# Altium PCB Communication_Board.PcbDoc
Units mm, origin at the board's own origin, x right, y up, seen from the top; angles counter-clockwise.
Board outline 100 x 100 mm, 2 copper layers (Top Layer, Bottom Layer); 16 components, 10 nets, 68 pads, 8 vias.
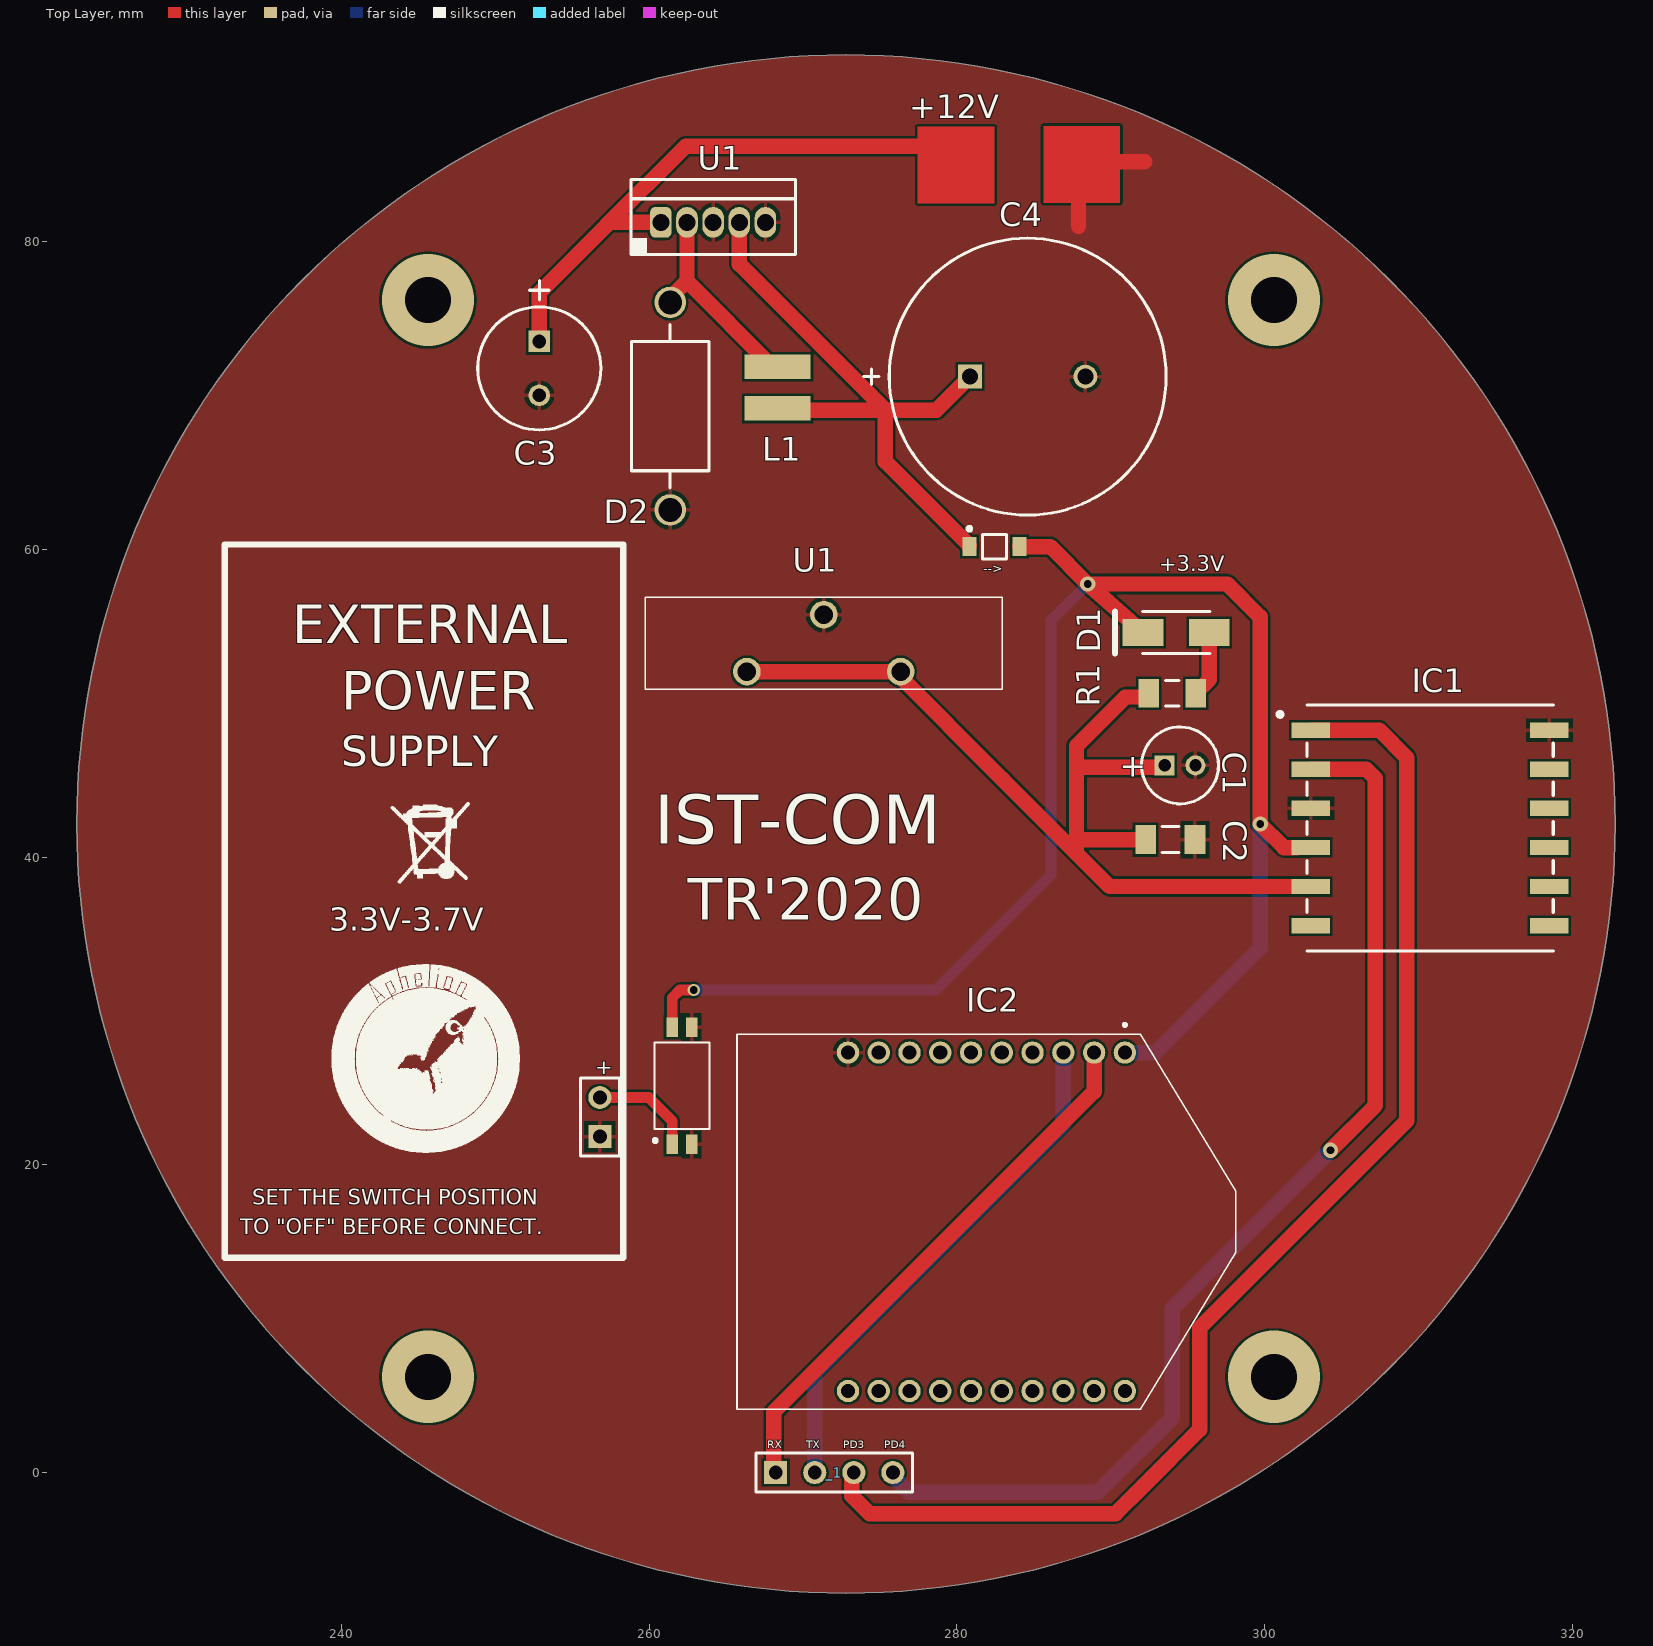
[diagram p0: Top Layer view]
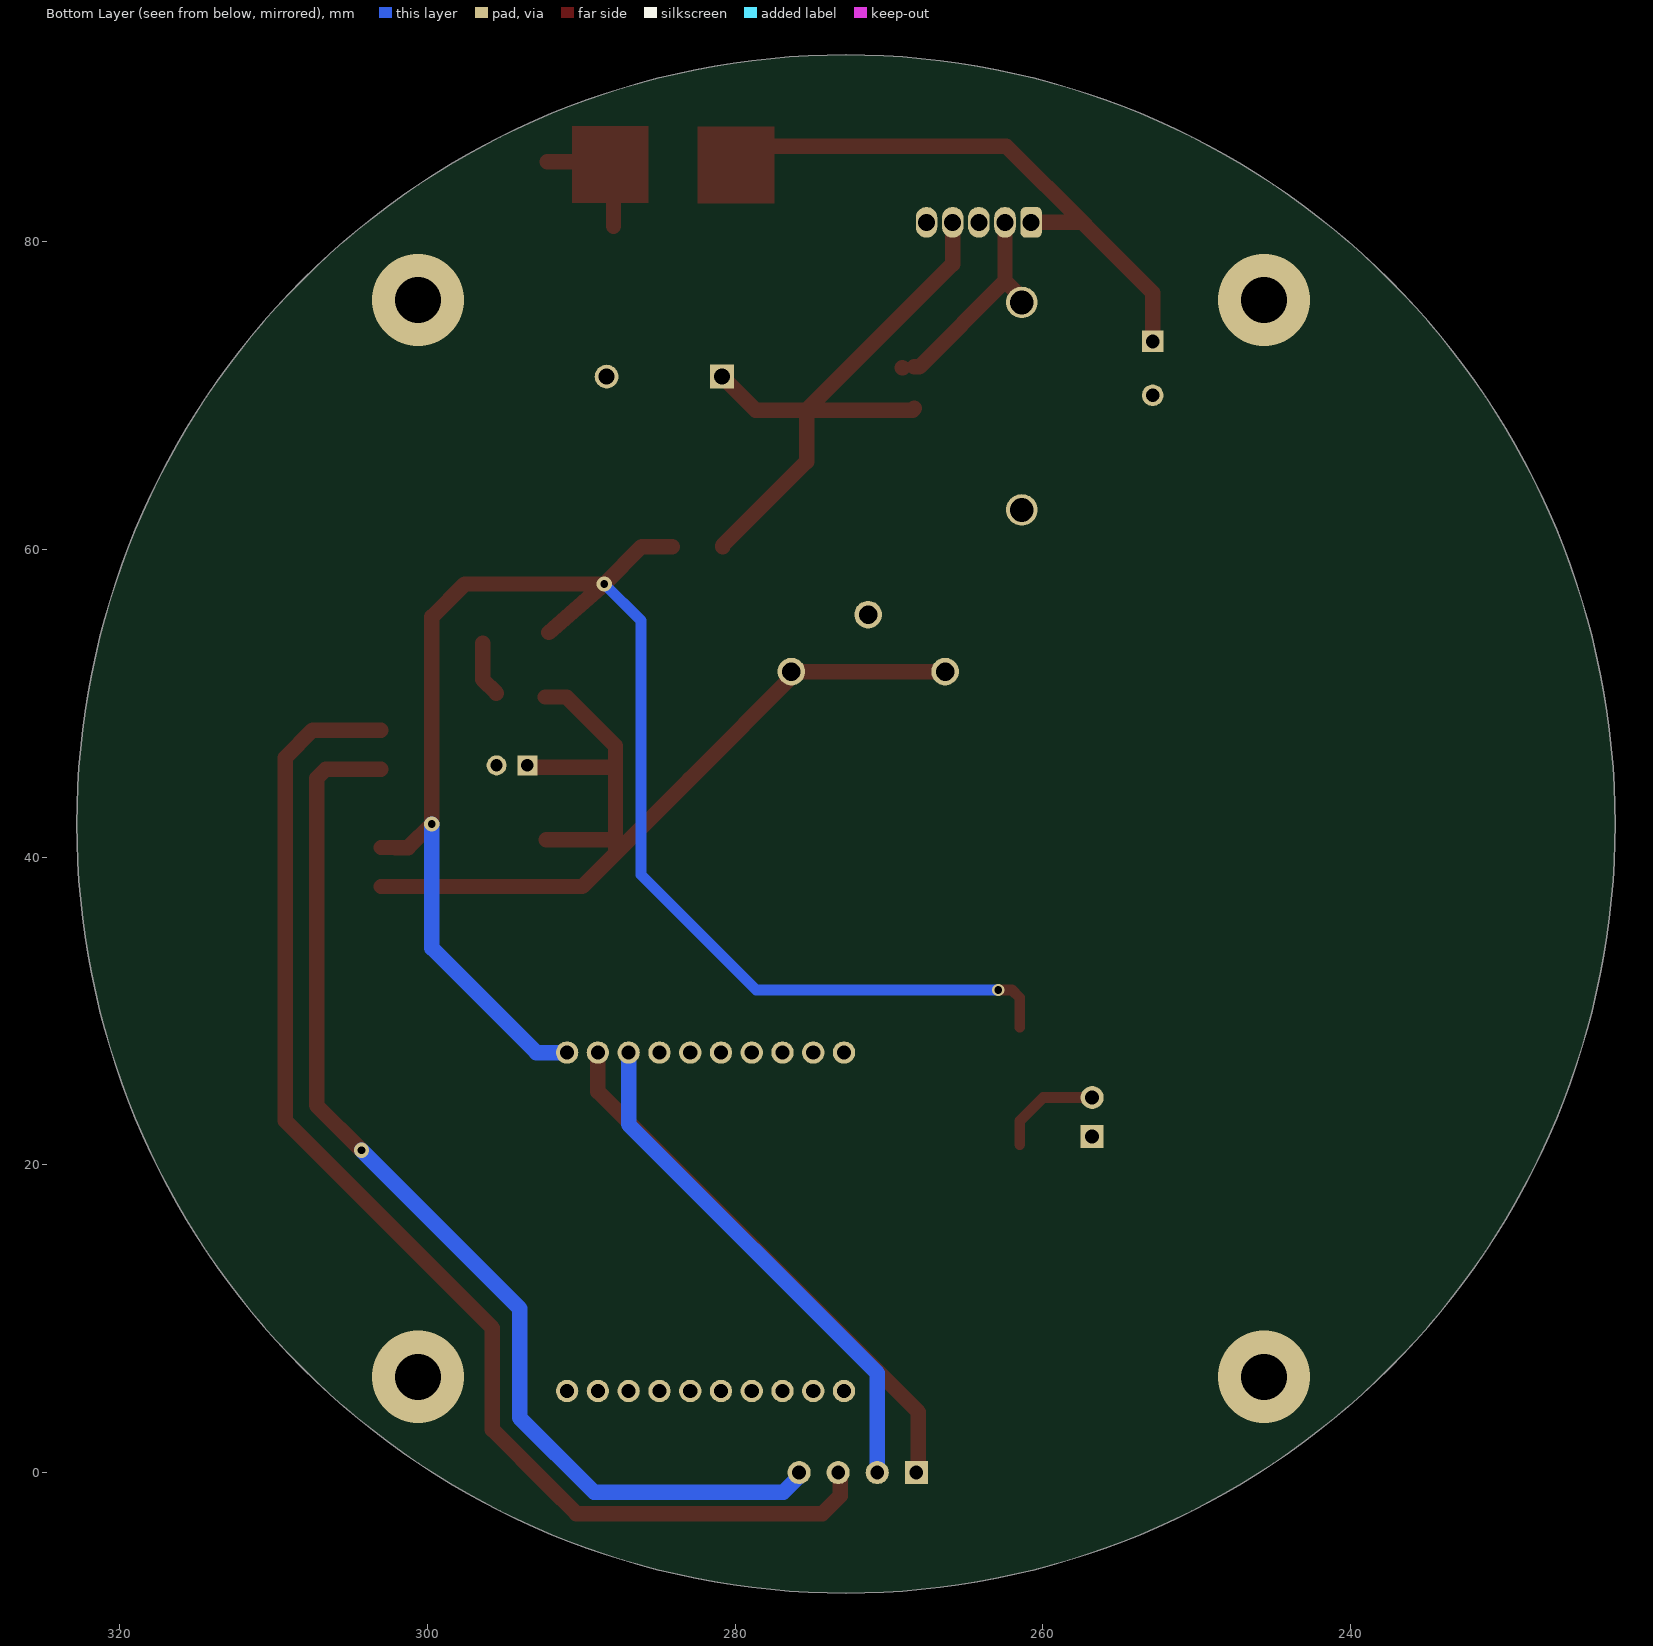
[diagram p1: Bottom Layer view, seen from below]

## Layer stack, top to bottom
Top Solder: solder mask 0.0102, Solder Resist, Dk 3.5
Top Layer: signal copper 0.0356
Dielectric 1: dielectric 0.32, FR-4, Dk 4.8
Bottom Layer: signal copper 0.0356
Bottom Solder: solder mask 0.0102, Solder Resist, Dk 3.5

## Board outline
222.796,42.164 ccw(c272.796,42.164) 272.796,-7.836 ccw(c272.796,42.164) 322.796,42.164 ccw(c272.796,42.164) 272.796,92.164 ccw(c272.796,42.164)

## Design rules (kind name [scope] priority, off if disabled: settings)
Clearance 0 [All] p1: gap=0.15 ignorepadtopadclearanceinfootprint=FALSE
Height [All] p1: minheight=0 maxheight=500 prefheight=12.7
PolygonConnect [All] p1: connectstyle=Relief reliefconductorwidth=0.254 reliefentries=4 polygonreliefangle="90 Angle" airgapwidth=0.254
RoutingVias [All] p1: holewidth=0.711 width=1.27 viastyle="Through Hole" minholewidth=0.711 minwidth=1.27 maxholewidth=0.711 maxwidth=1.27
SolderMaskExpansion [All] p1: expansion=0.102 istentingtop=FALSE
Width [All] p1: maxlimit=20 minlimit=0.1 preferedwidth=0.254 minimp=50.000000 maximp=50.000000 favimp=50.000000
29 further rules are at their usual default settings.

## Classes and differential pairs
component class Communication: C1 C2 C3 C4 D1 D2 IC1 IC2 L1 R1 U1

## Components (designator, comment, footprint, x,y, rotation, side; value= is the part's Value field where it differs from the comment)
_1 "Comment" HDR1X4 268.224,0 r0 top
C1 "10uF" CAPPR55-200-1100X500X1200 294.513,45.974 r0 top
C2 "CAP 100nF" CAPC1206(3216)190_M 293.878,41.148 r180 top value=100nF
C3 "100uF" CAPPR65-350-1150X800X1250 252.857,71.783 r270 top
C4 "330uF" CAPPR80-750-2000X1800X2200 284.607,71.247 r0 top
D1 "SS14" FAIR-DO-214AC-2_V 294.259,54.61 r180 top
D2 "1N5822" ONSC-AXIAL_LEAD-2-267-05_V 261.366,69.328 r270 top
IC1 "L80-M39" L80-M39 318.522,36.83 r180 top
IC2 "XBP24CZ7WIT-004" XBP24CZ7WIT004 290.925,27.305 r270 top
L1 "744031101" WE-TPC-3816-S 268.351,70.532 r270 top
R1 "1K" RESC3216X60X45ML15T20 294.005,50.673 r0 top
U1 "LM2575T-3.3/NOPB" KC0005A 264.16,81.28 r90 top (schematic designator U?)
U1 "KLS5-CR2032-04" KLS5CR203204 276.352,52.07 r180 top
? "Comment" ONSC-SOD-123-2-425-04_V 282.448,60.198 r0 top
? "Comment" HDR1X2 256.794,21.844 r90 top
? "Comment" 416131160802 262.128,25.146 r0 top

## Footprints (in the part's own frame and the unit in brackets; to place one, negate y for a bottom-side part, rotate by r counter-clockwise, add the part's x,y. Pads: shape width x height; smd on the part's side, far side on the other; paste and mask are expansions set on the pad)
416131160802 [mm] "02p, 1.27mm Pitch, Horizontal, HP Type, SMT, flat Actuator, black, with Tape, T&R"
  rect 0.76x1.27 smd: 1(-0.635,-3.81) 2(0.635,-3.81) 3(0.635,3.81) 4(-0.635,3.81)
  silkscreen extent -1.83,-3.66 1.79,2.8, body extent -1.79,-4 1.79,4, height 2.06
CAPC1206(3216)190_M [mm] "Chip Capacitor, Body 3.2x1.6mm, Height 1.9mm, IPC Low Density"
  rect 1.35x1.9 smd: 1(-1.6,0) 2(1.6,0)
  silkscreen extent -0.55,-0.85 0.55,0.85, body extent -1.7,-0.9 1.7,0.9, height 1.9
CAPPR55-200-1100X500X1200 [mm] "THD, 2-Leads, Dia 5mm, Body Length 11mm"
  rect 1.3x1.3 hole 0.8: 1(-1,0)
  round 1.3 hole 0.8: 2(1,0)
  silkscreen extent -2.5,-2.5 2.5,2.5, body extent -2.5,-2.5 2.5,2.5, height 12
CAPPR65-350-1150X800X1250 [mm] "THD, 2-Leads, Dia 8mm, Body 11.5mm"
  rect 1.4x1.4 hole 0.9: 1(-1.75,0)
  round 1.4 hole 0.9: 2(1.75,0)
  silkscreen extent -5.71,-4 4,4, body extent -4,-4 4,4, height 12.5
CAPPR80-750-2000X1800X2200 [mm] "THD, 2-Leads, Dia 18mm, Body Length 22mm"
  rect 1.55x1.55 hole 1.05: 1(-3.75,0)
  round 1.55 hole 1.05: 2(3.75,0)
  silkscreen extent -10.66,-9 9,9, body extent -9,-9 9,9, height 22
FAIR-DO-214AC-2_V [mm] "DO-214, 2-Leads, Body 4.375x2.725mm"
  rect 2.65x1.75 smd: 1(-2.15,0) 2(2.15,0)
  silkscreen extent -2.19,-1.36 3.98,1.36, body extent -2.19,-1.36 2.19,1.36, height 2.5
HDR1X2 [mm] "Connector; Header; 2 Position"
  rect 1.5x1.5 hole 0.9: 1(0,0)
  round 1.5 hole 0.9: 2(2.54,0)
  silkscreen extent -1.27,-1.27 3.81,1.27
HDR1X4 [mm] "Connector; Header; 4 Position"
  rect 1.5x1.5 hole 0.9: 1(0,0)
  round 1.5 hole 0.9: 2(2.54,0) 3(5.08,0) 4(7.62,0)
  silkscreen extent -1.27,-1.27 8.89,1.27
KC0005A [mm] "FM, 5-Leads, Body 10.16x8.46mm, Pitch 1.7mm"
  rrect50% 2x1.4 hole 1.1: 1(0,3.4)
  oval 2x1.4 hole 1.1: 2(0,1.7) 3(0,0) 4(0,-1.7) 5(0,-3.4)
  silkscreen extent -2.13,-5.35 2.8,5.35, body extent -2.08,-5.35 2.77,5.35, height 16.51
KLS5CR203204 [mm]
  round 1.8 hole 1.2: 1(0,0) 2(10,0) 3(5,-3.7)
  silkscreen extent -6.6,-4.85 16.6,1.15, body extent -6.6,-4.85 16.6,1.15, height 18.13
L80-M39 [mm]
  rect 2.5x1 smd: 1(15.5,-11.43) 2(15.5,-8.89) 3(15.5,-6.35) 4(15.5,-3.81) 5(15.5,-1.27) 6(15.5,1.27) 7(0,1.27) 8(0,-1.27) 9(0,-3.81) 10(0,-6.35) 11(0,-8.89) 12(0,-11.43)
  silkscreen extent -0.25,-13.08 17.65,2.92
ONSC-AXIAL_LEAD-2-267-05_V [mm] "AXIAL, 2-Leads, Diameter 5.05mm"
  round 2.05 hole 1.55: 1(-6.745,0) 2(6.745,0)
  silkscreen extent -5.32,-2.52 5.32,2.52
ONSC-SOD-123-2-425-04_V [mm] "SOD, 2-Leads, Body 2.69x1.6mm"
  rect 0.91x1.22 smd: 1(-1.635,0) 2(1.635,0)
  silkscreen extent -1.76,-0.8 0.78,1.28, body extent -1.35,-0.8 1.35,0.8, height 1.35
RESC3216X60X45ML15T20 [mm] "Chip Resistor, 2-Leads, Body 3.3x1.75mm, IPC Low Density"
  rect 1.35x1.85 smd: 1(-1.525,0) 2(1.525,0)
  silkscreen extent -0.45,-0.82 0.45,0.82, body extent -1.65,-0.87 1.65,0.87, height 0.6
WE-TPC-3816-S [mm] "SMD Inductor, 2-Leads, Body 3.8 x 3.8 mm"
  rect 1.6x4.3 smd: 1(-1.35,0) 2(1.35,0)
  body extent -1.9,-1.9 1.9,1.9, height 1.64
XBP24CZ7WIT004 [mm]
  round 1.45 hole 0.92: 1(0,0) 2(0,-2) 3(0,-4) 4(0,-6) 5(0,-8) 6(0,-10) 7(0,-12) 8(0,-14) 9(0,-16) 10(0,-18) 11(22,-18) 12(22,-16) 13(22,-14) 14(22,-12) 15(22,-10) 16(22,-8) 17(22,-6) 18(22,-4) 19(22,-2) 20(22,0)
  silkscreen extent -1.9,-25.21 23.19,7.21, body extent -1.19,-25.21 23.19,7.21, height 2.79

## Part data
C1: library part CMP-2100-03622-1, "Aluminum Electrolytic Capacitor, 10 uF, +/- 20%, 50 V, -40 to 85 degC, 2-Pin THD, RoHS, Bulk", Case/Package=Radial, Dielectric Material=Aluminium, Leakage Current=3uA, Manufacturer=Panasonic, Max Operating Temperature=85degC, Min Operating Temperature=-40degC, Package Description="2-Pin Radial Lead, Dia 5 mm, Height 12 mm", Package Quantity=200, Package Reference=CAPPR55-200-1100X500X1200, Ripple Current=65mA, Tolerance=20%, Voltage=50V, Capacitance=10uF, Datasheet URL=https://industrial.panasonic.com/cdbs/www-data/pdf/RDF0000/ABA0000C1218.pdf, Datasheet Version="Rev. 05, 10/2016", Diameter=5mm, Dissipation Factor=0.12%, Height=11mm, Height - Seated (Max)=0.472inch, Lead Diameter=0.5mm, Lead Free=LeadFree, Lead Pitch=2mm, Lead/Base Style=Straight, Length=11mm, Life (Hours)=2000Hour, Manufacturer URL=http://www.panasonic.com/, Mount=ThroughHole, Number of Pins=2, Packaging=Bulk, Radiation Hardening=No, REACH SVHC=NoSVHC, Ripple Current (AC)=65mA, RoHSCompliant=true, Termination=Radial, Voltage Rating=50V, Voltage Rating (DC)=50V
C2: library part CMP-1037-04189-1, "CAP 100nF 25V ±5% 1206 (3216 Metric) Thickness 1.9mm SMD", Case-EIA=1206, Case-Metric=3216, Rated Voltage="25 V", Tolerance=Â±5%, Max Thickness="1.9 mm", Technology=SMT
C3: library part CMP-2100-03623-1, "Aluminum Electrolytic Capacitor, 100 uF, +/- 20%, 50 V, -40 to 85 degC, 2-Pin THD, RoHS, Bulk", Case/Package=Radial, Dielectric Material=Aluminium, Leakage Current=3uA, Manufacturer=Panasonic, Max Operating Temperature=85degC, Min Operating Temperature=-40degC, Package Description="2-Pin Radial Lead, Dia 8 mm, Height 12.5 mm", Package Quantity=200, Package Reference=CAPPR65-350-1150X800X1250, Ripple Current=250mA, Tolerance=20%, Voltage=50V, Capacitance=100uF, Datasheet URL=https://industrial.panasonic.com/cdbs/www-data/pdf/RDF0000/ABA0000C1218.pdf, Datasheet Version="Rev. 05, 10/2016", Diameter=8mm, Dissipation Factor=0.12%, Height=11.5mm, Height - Seated (Max)=0.492inch, Lead Diameter=0.6mm, Lead Free=LeadFree, Lead Pitch=3.5mm, Lead/Base Style=Straight, Length=11.5mm, Life (Hours)=2000Hour, Manufacturer URL=http://www.panasonic.com/, Mount=ThroughHole, Number of Pins=2, Packaging=Bulk, Polarity=Polar, Radiation Hardening=No, REACH SVHC=NoSVHC, Ripple Current (AC)=250mA, RoHSCompliant=true, Termination=Radial, Voltage Rating=50V, Voltage Rating (DC)=50V
C4: library part CMP-2000-07350-1, "Aluminum Electrolytic Capacitor, 330 uF, +/- 20%, 100 V, -40 to 105 degC, 2-Pin THD, RoHS, Bulk", Capacitance=330µF, Case Size/Dimension=Ø18x20mm, Manufacturer=Nichicon, Operating Temp-Max=105°C, Package Description="2-Pin Through Hole Device, Dia 18 mm, Body Length 22 mm", Package Reference=CAPPR80-750-2000X1800X2200, Rated Voltage=100V, Datasheet URL=http://products.nichicon.co.jp/en/pdf/XJA043/e-uhe.pdf, Datasheet Version=08/2015, Manufacturer URL=http://www.nichicon.co.jp/english/, Mounting Technology=ThroughHole, Type=Radial
D1: library part CMP-2000-04943-1, "Schottky Rectifier, 1.1 W, -65 to 125 degC, 2-Pin SMD, RoHS, Tape and Reel", Average Forward Current-Max (A)=1, Manufacturer=Fairchild, Package Body Material=PLASTIC/EPOXY, Package Description="2-Pin Surface Mount Device, Body 4.375 x 2.725 mm", Package Reference=DO-214AC-2, Package Shape=RECTANGULAR, Package Style=SMALLOUTLINE, Peak Reflow Temperature (Cel)=260, Power Dissipation Limit-Max (W)=1.1, Rep Pk Reverse Voltage-Max (V)=40, Additional Feature=FREEWHEELINGDIODE, CAGE Code=1HBD3,07933,59621,7D893, Configuration=SINGLE, Datasheet URL=http://www.onlinecomponents.com/datasheet/ss14.aspx?p=11369800, Datasheet Version=Oct-13, Diode Element Material=SILICON, JEDEC-95 Code=DO-214AC, JESD-30 Code=R-PDSO-C2, JESD-97 Code=e3, Lead Free=YES, Manufacturer URL=https://www.fairchildsemi.com/, Moisture Sensitivity Level=1, Number of Elements=1, Number of Terminals=2, Package URL=https://www.fairchildsemi.com/package-drawings/DO/DO214AC.pdf, RoHS Compliant=YES, Signal Diode Type=SIGNALDIODE, Surface Mount=YES, Technology=SCHOTTKY, Terminal Finish=MATTETIN, Terminal Form=CBEND, Terminal Position=DUAL
D2: library part CMP-1055-00007-1, "Rectifier, 2-Pin Axial_Lead, Bulk Bag", Manufacturer="On Semiconductor", ComponentLink1Description="Manufacturer URL", ComponentLink1URL=http://www.onsemi.com/, ComponentLink2Description=Datasheet, ComponentLink2URL=http://www.onsemi.cn/pub_link/Collateral/1N5820-D.PDF, ComponentLink3Description="Package Specification", ComponentLink3URL=http://www.onsemi.com/pub_link/Collateral/267-05.PDF, Configuration=Single, DatasheetVersion="Rev. 10", Mounting Technology="Through Hole", Note1=0, PackageDescription="2-Pin, Axial Lead, Diameter 5.05 mm", PackageReference=AXIAL_LEAD-2-267-05, PackageVersion="Rev. G, 06/2000", Packing="Bulk Bag", PartNumber=1N5822, RoHS=FALSE, IFSM Max (A)=80
IC1: "Integrated Circuit", Manufacturer_Name=Quectel, RS Part Number=9084088, Datasheet Link=http://docs-emea.rs-online.com/webdocs/147d/0900766b8147dbf2.pdf, Manufacturer_Part_Number=L80-M39, RS Price/Stock=http://uk.rs-online.com/web/p/products/9084088
IC2: "Integrated Circuit", Manufacturer_Name="Digi International", Mouser Part Number=888-XBP24CZ7WIT-004, RS Part Number=1359739, Datasheet Link=https://componentsearchengine.com/Datasheets/1/XBP24CZ7WIT-004.pdf, Height=2.79mm, Manufacturer_Part_Number=XBP24CZ7WIT-004, Mouser Price/Stock=https://www.mouser.com/Search/Refine.aspx?Keyword=888-XBP24CZ7WIT-004, RS Price/Stock=http://uk.rs-online.com/web/p/products/1359739
L1: library part CMP-0227-00344-1, "SMD Shielded Tiny Power Inductor WE-TPC, L = 100 µH", Inductance="100 ÂµH", ComponentLink1Description="Manufacturer Link", ComponentLink1URL=http://www.we-online.com, ComponentLink2Description=Datasheet, ComponentLink2URL=http://www.we-online.de/katalog/media/pdf/744031101.pdf, DatasheetVersion="ver 6, Jan-2009", PackageDescription="SMD Inductor, 2-Leads, Body 3.8 x 3.8 mm", PackageReference=WE-TPC-3816-S, PackageVersion=2009
R1: library part CMP-2100-03616-1, "Chip Resistor, 1 KOhm, +/- 1%, 0.25 W, -55 to 155 degC, 1206 (3216 Metric), RoHS, Tape and Reel", Case Code (Metric)=3216, Case Code (Imperial)=1206, Manufacturer="Vishay Semiconductor", Max Operating Temperature=155degC, Max Power Dissipation=250mW, Min Operating Temperature=-55degC, Package Description="2-Pin Surface Mount Device, Body 3.15 x 1.6 mm", Package Quantity=10, Package Reference=1206.0, Resistance=1KOhm, Temperature Coefficient=100ppm/degreesC, Tolerance=1%, Voltage Rating=200V, Case/Package=1206, Composition=ThickFilm, Contact Plating=Tin, Datasheet URL=http://www.farnell.com/datasheets/1720486.pdf, Datasheet Version=41061.0, Depth=1.6mm, Height=0.55mm, Lead Free=LeadFree, Length=3.2mm, Manufacturer URL=http://www.vishay.com/, Military Standard=Not, Mount=SurfaceMount, Number of Pins=2, Number of Terminations=2, Packaging=TapeandReel, Power Rating=250mW, Radiation Hardening=No, REACH SVHC=Unknown, RoHSCompliant=true, Termination=SMD/SMT, Voltage Rating (DC)=200V, Weight=0.000353oz, Width=0.063inch
U1: library part CMP-0069-02027-3, "SIMPLE SWITCHER® 1A Step-Down Voltage Regulator, 5-pin TO-220, Pb-Free", Manufacturer="Texas Instruments", PackageTopMarking="NSUZXYTTE#*LM2575T*-3.3 P+", PowerWise=N, Code_JEDEC=TO-220-AB, ComponentLink1Description="Datasheet URL", ComponentLink1URL=http://www.ti.com/general/docs/lit/getliterature.tsp?genericPartNumber=LM2575-N&fileType=pdf, CompType=Switcher, PackageDescription="TO-220, Molded, 5 Lead, Straight", PackageReference=KC0005A, PinCount=5, RoHS=Y
U1: "Undefined or Miscellaneous", Manufacturer_Name="KLS Electronic", Datasheet Link=http://www.klsele.com/admin/product_upload/20151124101114KLS5-CR2032-04.pdf, Height=18.13mm, Manufacturer_Part_Number=KLS5-CR2032-04

## Via types
v1: diameter 6, hole 3, Top Layer to Bottom Layer, 4 vias
v2: diameter 1, hole 0.5, Top Layer to Bottom Layer, 3 vias
v3: diameter 0.8, hole 0.5, Top Layer to Bottom Layer, 1 vias

## Nets (pads, with @x,y where several pads share a name; then routed paths per layer and width w, separated by ;. In a path a pad name is that pad's centre, name@x,y a point inside that pad or via, vN(x,y) a via of type N, cw(c..) or ccw(c..) an arc to the next point about the centre after c; other vN are vias at no path point)
+3.3V: 
+12V: C3.1 U1.1@260.76,81.28 | length 13
  Top Layer w1: C3.1 252.857,76.708 257.429,81.28 U1.1@260.76,81.28
GND: ?.1@256.794,21.844 ?.2@262.763,21.336 ?.3 C1.2 C2.1 C3.2 C4.2 D2.2 IC1.3 IC1.12 IC2.10 U1.3 U1.5 | length 9
  Top Layer w1: 287.909,81.026 287.909,85.598 288.29,85.217 292.227,85.217
NetC1_1: C1.1 C2.2 IC1.5 R1.1 U1.1@276.352,52.07 U1.2@266.352,52.07 | length 66.1
  Top Layer w1: U1.2@266.352,52.07 U1.1@276.352,52.07 ; U1.1@275.875,52.166 282.978,45.063 287.782,40.259 ; C2.2 287.782,41.148 ; R1.1@292.354,50.419 290.957,50.419 287.782,47.244 287.782,45.847 ; C1.1 293.386,45.847 287.782,45.847 ; IC1.5 289.941,38.1 287.782,40.259 ; 287.782,40.259 287.782,41.148 ; 287.782,41.148 287.782,45.847
NetC4_1: ?.1@280.813,60.198 C4.1 L1.2 U1.4 | length 40.7
  Top Layer w1: U1.4 265.86,78.564 275.352,69.072 ; L1.2 268.462,69.072 275.352,69.072 ; ?.1@280.813,60.198 280.813,60.263 275.352,65.723 275.352,69.072 ; C4.1 278.682,69.072 275.352,69.072
NetD1_1: D1.1 R1.2 | length 3.6
  Top Layer w1: R1.2 296.418,51.561 D1.1@296.418,53.91
NetD2_1: D2.1 L1.1 U1.2@262.46,81.28 | length 13.9
  Top Layer w1: D2.1 261.366,76.357 262.46,77.451 ; U1.2@262.48,81.26 262.46,81.28 262.46,77.451 ; L1.1 268.029,71.882 262.46,77.451 ; L1.1@269.113,71.811 L1.1@269.133,71.831
NetIC1_1: 
NetIC1_2: 
VCC: D1.2 IC1.4 IC2.1 | length 53.9
  Top Layer w1: D1.2 v2(288.511,57.765) 297.581,57.765 299.72,55.626 v2(299.72,42.164) 301.255,40.629 302.084,40.629 302.095,40.64 IC1.4
  Bottom Layer w1: IC2.1@290.987,27.305 292.927,27.305 299.72,34.098 v2(299.72,42.164)
pads on no net: ?.1@261.493,21.336 ?.2@256.794,24.384 ?.2@284.083,60.198 ?.4 _1.1 _1.2 _1.3 _1.4 IC1.1 IC1.2 IC1.6 IC1.7 IC1.8 IC1.9 IC1.10 IC1.11 IC2.2 IC2.3 IC2.4 IC2.5 IC2.6 IC2.7 IC2.8 IC2.9 IC2.11 IC2.12 IC2.13 IC2.14 IC2.15 IC2.16 IC2.17 IC2.18 IC2.19 IC2.20
copper on no net: | length 312.8
  Top Layer w0.7: 256.794,24.384 259.715,24.384 259.969,24.384 261.366,22.987 261.493,22.86 261.493,21.336 ; 261.493,28.956 261.493,30.861 262.001,31.369 v3(262.89,31.369)
  Top Layer w1: 257.175,81.026 262.382,86.233 278.71,86.233 280.035,84.908 280.035,84.836 ; 268.097,0.254 268.097,3.937 288.925,24.765 288.925,27.305 ; 273.304,0 273.177,-0.127 273.177,-1.524 274.32,-2.667 290.322,-2.667 292.1,-0.889 295.783,2.794 295.783,9.398 309.245,22.86 309.245,46.482 307.467,48.26 303.022,48.26 ; 279.781,84.836 279.781,85.162 ; 284.083,60.198 286.077,60.198 288.511,57.765 ; 303.022,45.72 306.627,45.72 307.213,45.134 307.213,23.876 v2(304.292,20.955)
  Bottom Layer w0.7: v3(262.89,31.369) 278.638,31.369 286.131,38.862 286.131,55.385 288.511,57.765
  Bottom Layer w1: 270.764,0.231 270.764,6.477 286.925,22.638 286.925,27.305 ; 275.717,-0.127 276.86,-1.27 289.179,-1.27 294.005,3.556 294.005,10.668 v2(304.292,20.955)
  other v1: 245.618,6.223 300.618,6.223 245.618,76.223 300.618,76.223

## Polygon pours and split planes (outlines as drawn)
GND on Top Layer "GROUND PLANE" (solid, pour order 3): 222.796,42.164 ccw(c272.796,42.164) 272.796,-7.836 ccw(c272.796,42.164) 322.796,42.164 ccw(c272.796,42.164) 272.796,92.164 ccw(c272.796,42.164)

## Other copper
Top Layer:
  rectangle net GND: 285.623,82.55 290.623,87.55
  rectangle net +12V: 277.448,82.503 282.448,87.503

## Silkscreen, mask and mechanical layers (free items; w line width, h text height)
Top Overlay:
  drawing of 3111 lines, arcs and shapes, not listed
  text "+12V" at 276.906,88.057 h1.52
  text "+3.3V" at 293.162,58.593 h1
  text "-->" at 281.732,58.466 h0.6
  text "EXTERNAL" at 236.793,53.913 h2.5
  text "POWER" at 239.968,49.595 h2.5
  text "SUPPLY" at 239.968,45.912 h2
  text "IST-COM" at 260.342,40.886 h3.2
  text "TR'2020" at 262.501,35.933 h2.7
  text "3.3V-3.7V" at 239.187,35.225 h1.5
  text "+" at 256.496,25.91 h1
  text "SET THE SWITCH POSITION" at 234.188,17.399 h1
  text "TO \"OFF\" BEFORE CONNECT." at 233.426,15.494 h1
  text "RX" at 267.662,1.597 h0.5
  text "TX" at 270.202,1.597 h0.5
  text "PD3" at 272.615,1.597 h0.5
  text "PD4" at 275.282,1.597 h0.5
Top Solder:
  rectangle: 285.75,82.677 290.55,87.477
  rectangle: 277.448,82.503 282.248,87.303
Mechanical 1:
  circle w0.2: c272.669,42.291 r50

## Text inside footprints (layer, text, board x,y; h text height)
C1: Top Overlay "+" at 290.605,45.237 h1.5